# EAGLE board PCB (EAGLE 9.7.0)

Size 291.88 x 126.88 mm. Coordinates in mm from the lower left corner, seen from the top.
Outline: 0,0 291.88,0 291.88,126.88 0,126.88 0,0
Copper layers (1*16): Top 0.035mm / dielectric 1.5mm / Bottom 0.035mm
Design rules "default": minimum track width 6mil, minimum drill 0.35mm, track to track 6mil, track to pad 6mil, pad to pad 6mil, via to via 6mil, smd to smd 6mil, copper to edge 40mil, drill to drill 6mil, minimum pad ring 10mil, minimum via ring 8mil, stop-mask expansion 4mil, vias tented up to drill 0mil, thermal gap 10mil

## Footprints (pad centres in the part's own frame; a part is rotated, then mirrored left to right if it is on the bottom)
LEDRD254W60D565H860B = drill 0.981 pad 1.581: 1 -1.27,0; 2 1.27,0
BATTERY-GENERIC = drill 1.118 pad 3.15 octagon: + 2.54,0; - -2.54,0
DIP762W53P254L1969H508Q14B = drill 0.743 pad 1.343: 1 -3.81,7.62; 2 -3.81,5.08; 3 -3.81,2.54; 4 -3.81,0; 5 -3.81,-2.54; 6 -3.81,-5.08; 7 -3.81,-7.62; 8 3.81,-7.62; 9 3.81,-5.08; 10 3.81,-2.54; 11 3.81,0; 12 3.81,2.54; 13 3.81,5.08; 14 3.81,7.62

## Placement (x,y rotation side)
D1  RED  [LEDRD254W60D565H860B]  272.62,47.16 180 top
D2  RED  [LEDRD254W60D565H860B]  277.93,47.16 180 top
D3  RED  [LEDRD254W60D565H860B]  283.36,47.16 180 top
D4  RED  [LEDRD254W60D565H860B]  273.12,37.53 180 top
D5  RED  [LEDRD254W60D565H860B]  278.55,37.41 180 top
D6  RED  [LEDRD254W60D565H860B]  283.97,37.53 180 top
D7  RED  [LEDRD254W60D565H860B]  273.36,27.54 180 top
D8  RED  [LEDRD254W60D565H860B]  278.92,27.79 180 top
D9  RED  [LEDRD254W60D565H860B]  284.47,27.66 180 top
D10  RED  [LEDRD254W60D565H860B]  273.73,17.92 180 top
D11  RED  [LEDRD254W60D565H860B]  279.53,18.17 180 top
D12  RED  [LEDRD254W60D565H860B]  285.08,18.17 180 top
D13  RED  [LEDRD254W60D565H860B]  274.1,8.05 180 top
D14  RED  [LEDRD254W60D565H860B]  279.9,8.17 180 top
D15  RED  [LEDRD254W60D565H860B]  285.82,8.17 180 top
P1  BATTERYGENERIC  [BATTERY-GENERIC]  17.53,73.09 180 top
U1  74HC86_PDIP  [DIP762W53P254L1969H508Q14B]  107.28,85.3 90 top
U2  74HC04_PDIP  [DIP762W53P254L1969H508Q14B]  130.14,85.3 90 top
U3  74HC32_PDIP  [DIP762W53P254L1969H508Q14B]  153,85.3 90 top
U4  74HC32_PDIP  [DIP762W53P254L1969H508Q14B]  175.86,85.3 90 top
U5  74HC08_PDIP  [DIP762W53P254L1969H508Q14B]  198.72,85.3 90 top
U6  74HC32_PDIP  [DIP762W53P254L1969H508Q14B]  221.58,85.3 90 top
U7  74HC08_PDIP  [DIP762W53P254L1969H508Q14B]  106.16,8.64 90 top
U8  74HC08_PDIP  [DIP762W53P254L1969H508Q14B]  129.02,8.64 90 top
U9  74HC32_PDIP  [DIP762W53P254L1969H508Q14B]  151.88,8.64 90 top
U10  74HC08_PDIP  [DIP762W53P254L1969H508Q14B]  174.74,8.64 90 top
U11  74HC32_PDIP  [DIP762W53P254L1969H508Q14B]  223,8.64 90 top
U12  74HC32_PDIP  [DIP762W53P254L1969H508Q14B]  200.14,8.64 90 top
U13  74HC32_PDIP  [DIP762W53P254L1969H508Q14B]  245.86,8.64 90 top
UOR  74HC04_PDIP  [DIP762W53P254L1969H508Q14B]  14.93,119.23 90 top

## Library data of the parts
D1-D15 = Tinkercad; CATEGORY: Opto-Electronic; SUB-CATEGORY: LED; VALUE: LED_RED
P1 U1-U13 UOR = Tinkercad

## Nets
P1+: P1.+ U1.1 U1.2 U1.4 U1.5 U1.12 U1.13 U1.14 U2.14 U3.4 U3.9 U3.12 U3.14 U4.10 U4.12 U4.14 U5.1 U5.2 U5.9 U5.14 U6.14 U7.9 U7.14 U8.4 U8.9 U8.10 U8.14 U9.14 U10.2 U10.4 U10.5 U10.14 U11.10 U11.12 U11.14 U12.14 U13.12 U13.14 UOR.3 UOR.11 UOR.13 UOR.14
P1-: D1.2 D2.2 D3.2 D4.2 D5.2 D6.2 D7.2 D8.2 D9.2 D10.2 D11.2 D12.2 D13.2 D14.2 D15.2 P1.- U1.7 U2.7 U3.2 U3.7 U4.7 U4.13 U5.7 U6.7 U7.7 U8.7 U9.7 U9.10 U10.7 U11.7 U11.13 U12.2 U12.7 U12.12 U13.7 U13.13 UOR.1 UOR.7
U1_1Y: U1.3 U2.1
U1_2Y: U1.6 U6.4 U12.1
U1_4Y: U1.11 U12.13
U3_1A: U2.2 U3.1
U3_1Y: U3.3 U3.5
U3_2Y: D1.1 U3.6
U3_3Y: D2.1 U3.8
U3_4B: U3.13 U5.13 U6.5 U6.10 U7.12 U10.1 U10.13 UOR.4
U3_4Y: U3.10 U3.11
U4_2Y: D3.1 U4.6
U4_3A: D10.1 U4.9 U5.5 U8.2 U8.12 U10.9 U10.12 U11.9 U12.10 UOR.10
U4_3Y: U4.5 U4.8
U4_4Y: U4.4 U4.11
U5_1Y: U5.3 U5.4
U5_2Y: U5.6 U6.1
U5_3Y: U5.8 U6.12
U5_4A: U5.10 U5.12 U7.10 U8.1 U8.13 U10.10 UOR.12
U5_4Y: U5.11 U6.13
U6_1Y: D4.1 U6.3
U6_2Y: D13.1 D14.1 U6.6
U6_3Y: D15.1 U6.8
U6_4Y: U6.2 U6.11
U7_2Y: U7.6 U9.1
U7_3Y: U7.5 U7.8
U7_4B: U6.9 U7.13 UOR.2
U7_4Y: U7.4 U7.11
U8_1Y: U8.3 U8.5
U8_2Y: U8.6 U9.2
U8_3Y: U8.8 U9.13
U8_4Y: U8.11 U9.12
U9_1Y: D5.1 D11.1 U9.3
U9_2Y: D6.1 U9.6
U9_3A: U9.9 U10.11
U9_3Y: U9.5 U9.8
U9_4Y: U9.4 U9.11
U10_1Y: U10.3 U12.4
U10_2Y: U10.6 U11.2
U10_3Y: U10.8 U11.1
U11_1Y: U11.3 U13.1
U11_2Y: D9.1 U11.6
U11_3Y: U11.5 U11.8
U11_4Y: U11.4 U11.11
U12_1Y: U12.3 U12.5
U12_2Y: D8.1 U12.6
U12_3Y: D7.1 U12.8
U12_4Y: U12.9 U12.11
U13_1Y: D12.1 U13.3
U13_4Y: U13.2 U13.11

## Tracks (layer width: path | path; a pad name or v marks a point on that pad's centre or on a via)
P1+  (41 unrouted)
P1-  (37 unrouted)
U1_1Y  (1 unrouted)
U1_2Y  (2 unrouted)
U1_4Y  (1 unrouted)
U3_1A  (1 unrouted)
U3_1Y  (1 unrouted)
U3_2Y  (1 unrouted)
U3_3Y  (1 unrouted)
U3_4B  (7 unrouted)
U3_4Y  (1 unrouted)
U4_2Y  (1 unrouted)
U4_3A  (9 unrouted)
U4_3Y  (1 unrouted)
U4_4Y  (1 unrouted)
U5_1Y  (1 unrouted)
U5_2Y  (1 unrouted)
U5_3Y  (1 unrouted)
U5_4A  (6 unrouted)
U5_4Y  (1 unrouted)
U6_1Y  (1 unrouted)
U6_2Y  (2 unrouted)
U6_3Y  (1 unrouted)
U6_4Y  (1 unrouted)
U7_2Y  (1 unrouted)
U7_3Y  (1 unrouted)
U7_4B  (2 unrouted)
U7_4Y  (1 unrouted)
U8_1Y  (1 unrouted)
U8_2Y  (1 unrouted)
U8_3Y  (1 unrouted)
U8_4Y  (1 unrouted)
U9_1Y  (2 unrouted)
U9_2Y  (1 unrouted)
U9_3A  (1 unrouted)
U9_3Y  (1 unrouted)
U9_4Y  (1 unrouted)
U10_1Y  (1 unrouted)
U10_2Y  (1 unrouted)
U10_3Y  (1 unrouted)
U11_1Y  (1 unrouted)
U11_2Y  (1 unrouted)
U11_3Y  (1 unrouted)
U11_4Y  (1 unrouted)
U12_1Y  (1 unrouted)
U12_2Y  (1 unrouted)
U12_3Y  (1 unrouted)
U12_4Y  (1 unrouted)
U13_1Y  (1 unrouted)
U13_4Y  (1 unrouted)